# Altium PCB bbr18_ball_led_board.PcbDoc
Units mm, origin at the board's own origin, x right, y up, seen from the top; angles counter-clockwise.
Board outline 47.8 x 54.86 mm, 2 copper layers (Top Layer, Bottom Layer), stack 1.571 mm thick; 8 components, 5 nets, 21 pads, 0 vias.
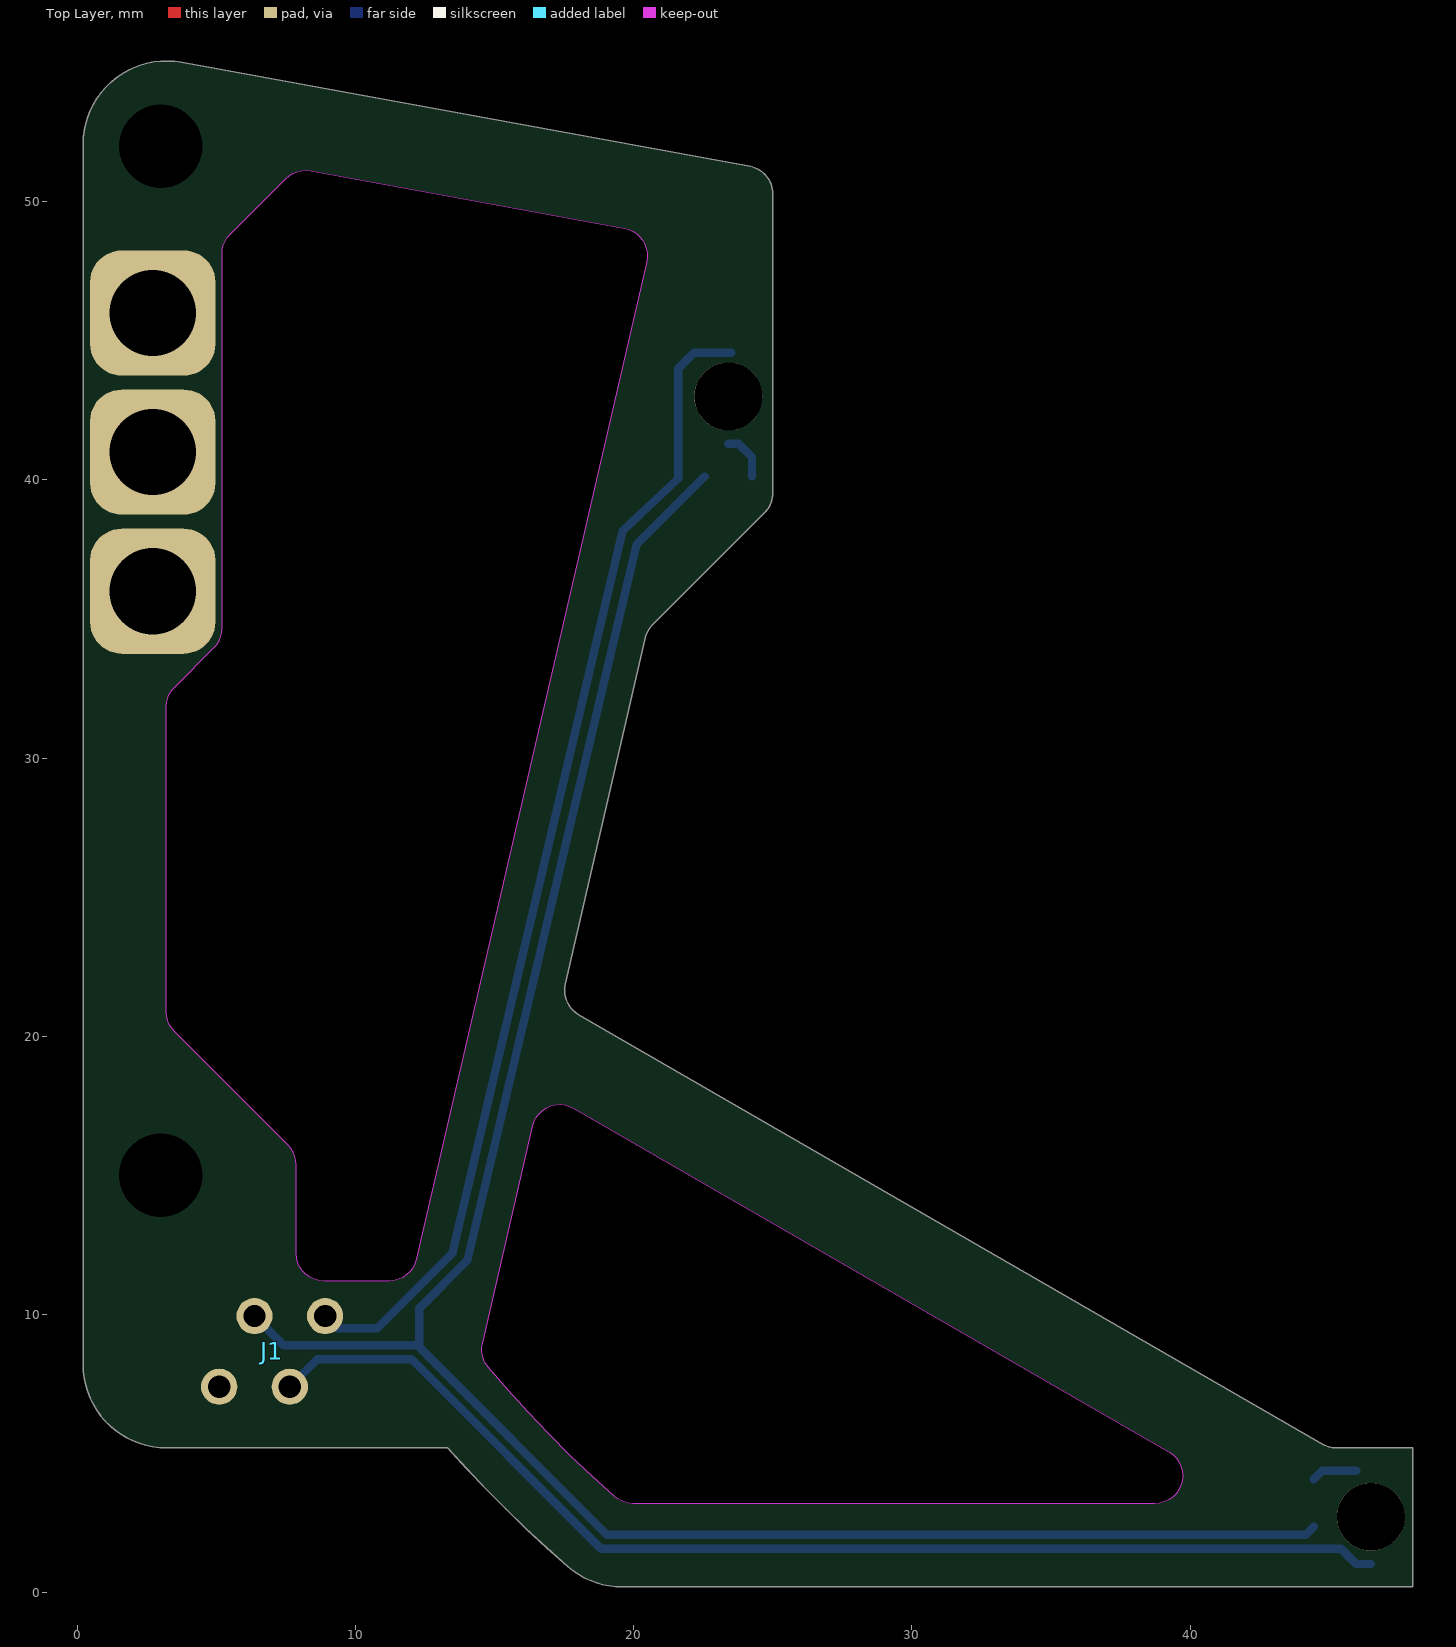
[diagram p0: Top Layer view]
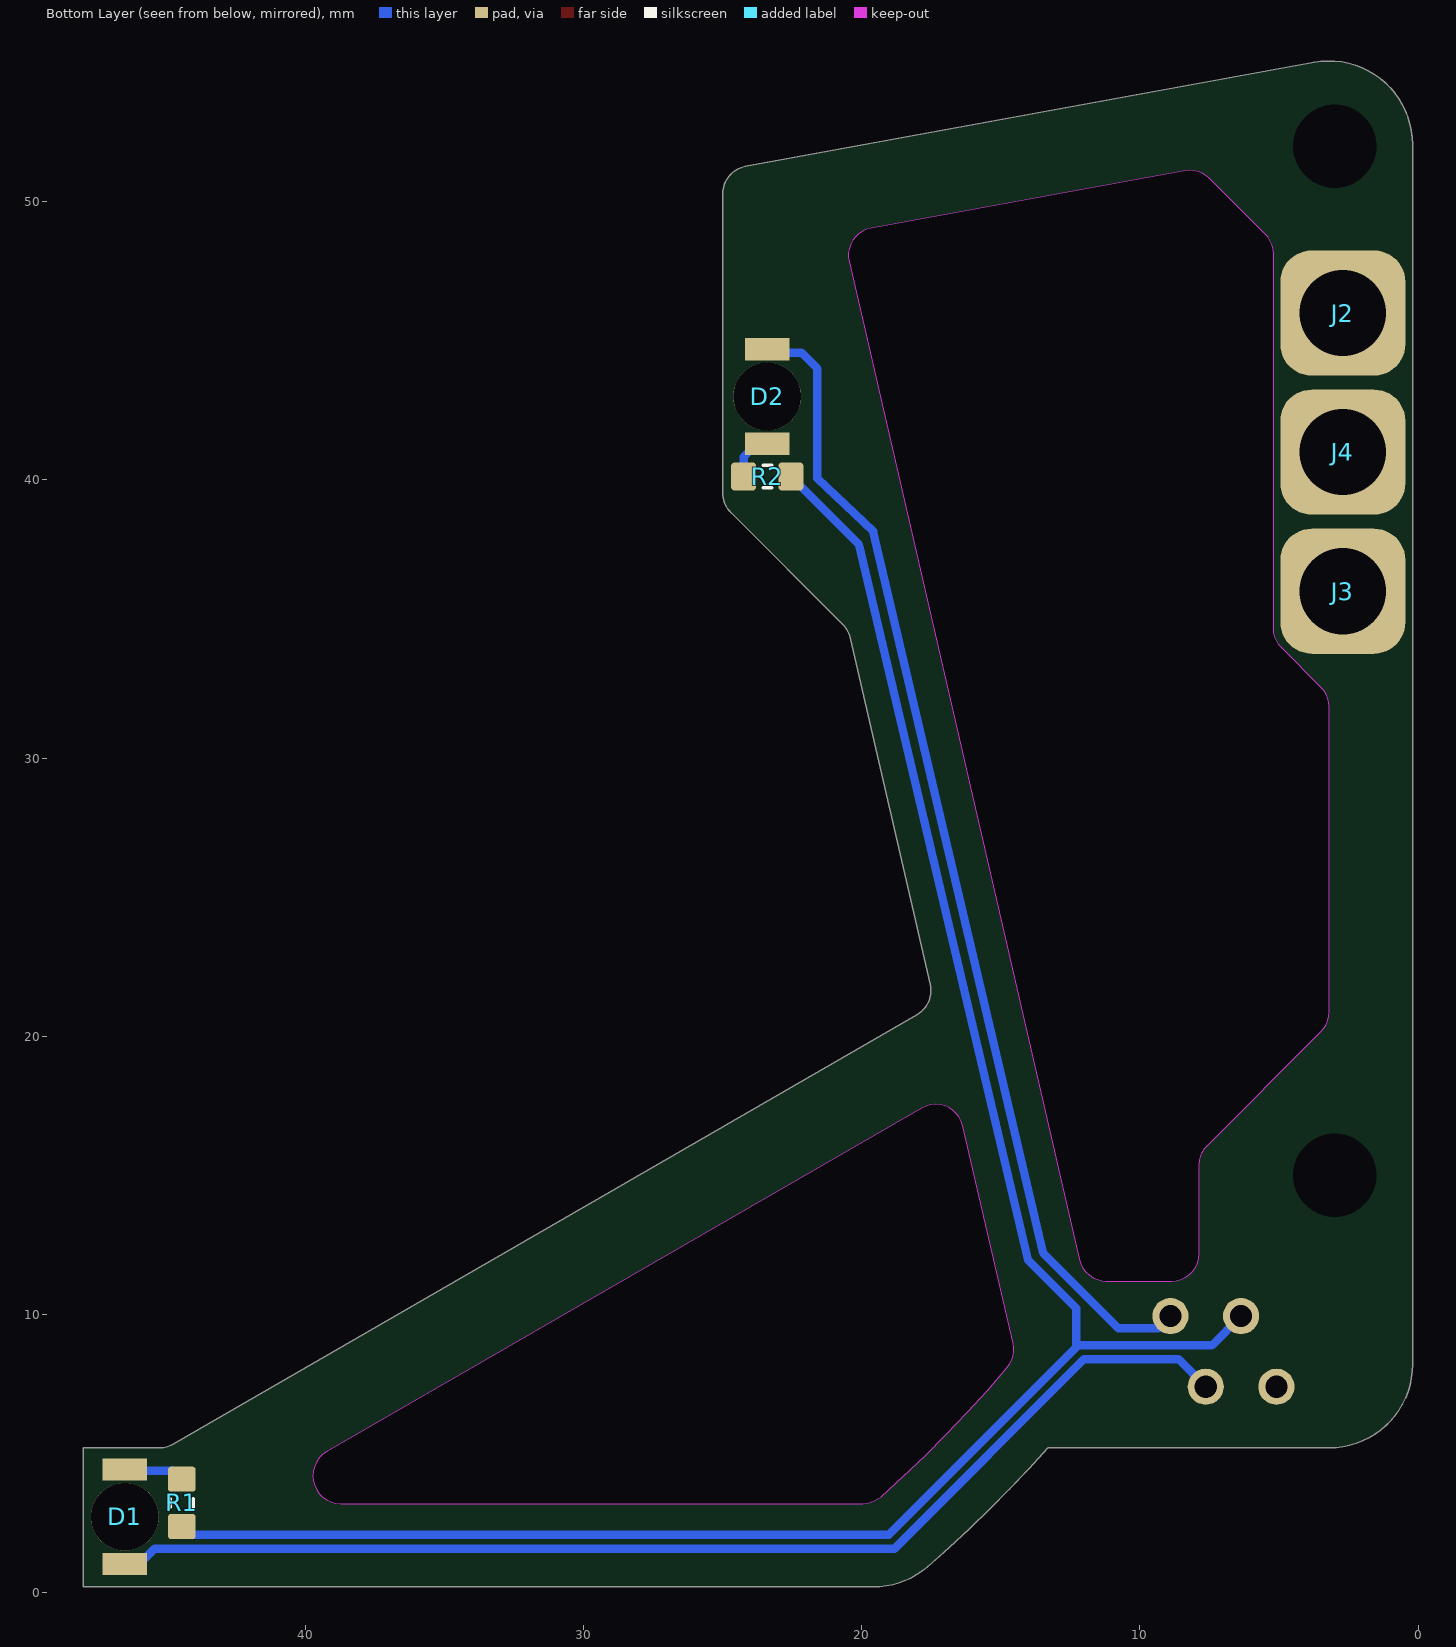
[diagram p1: Bottom Layer view, seen from below]
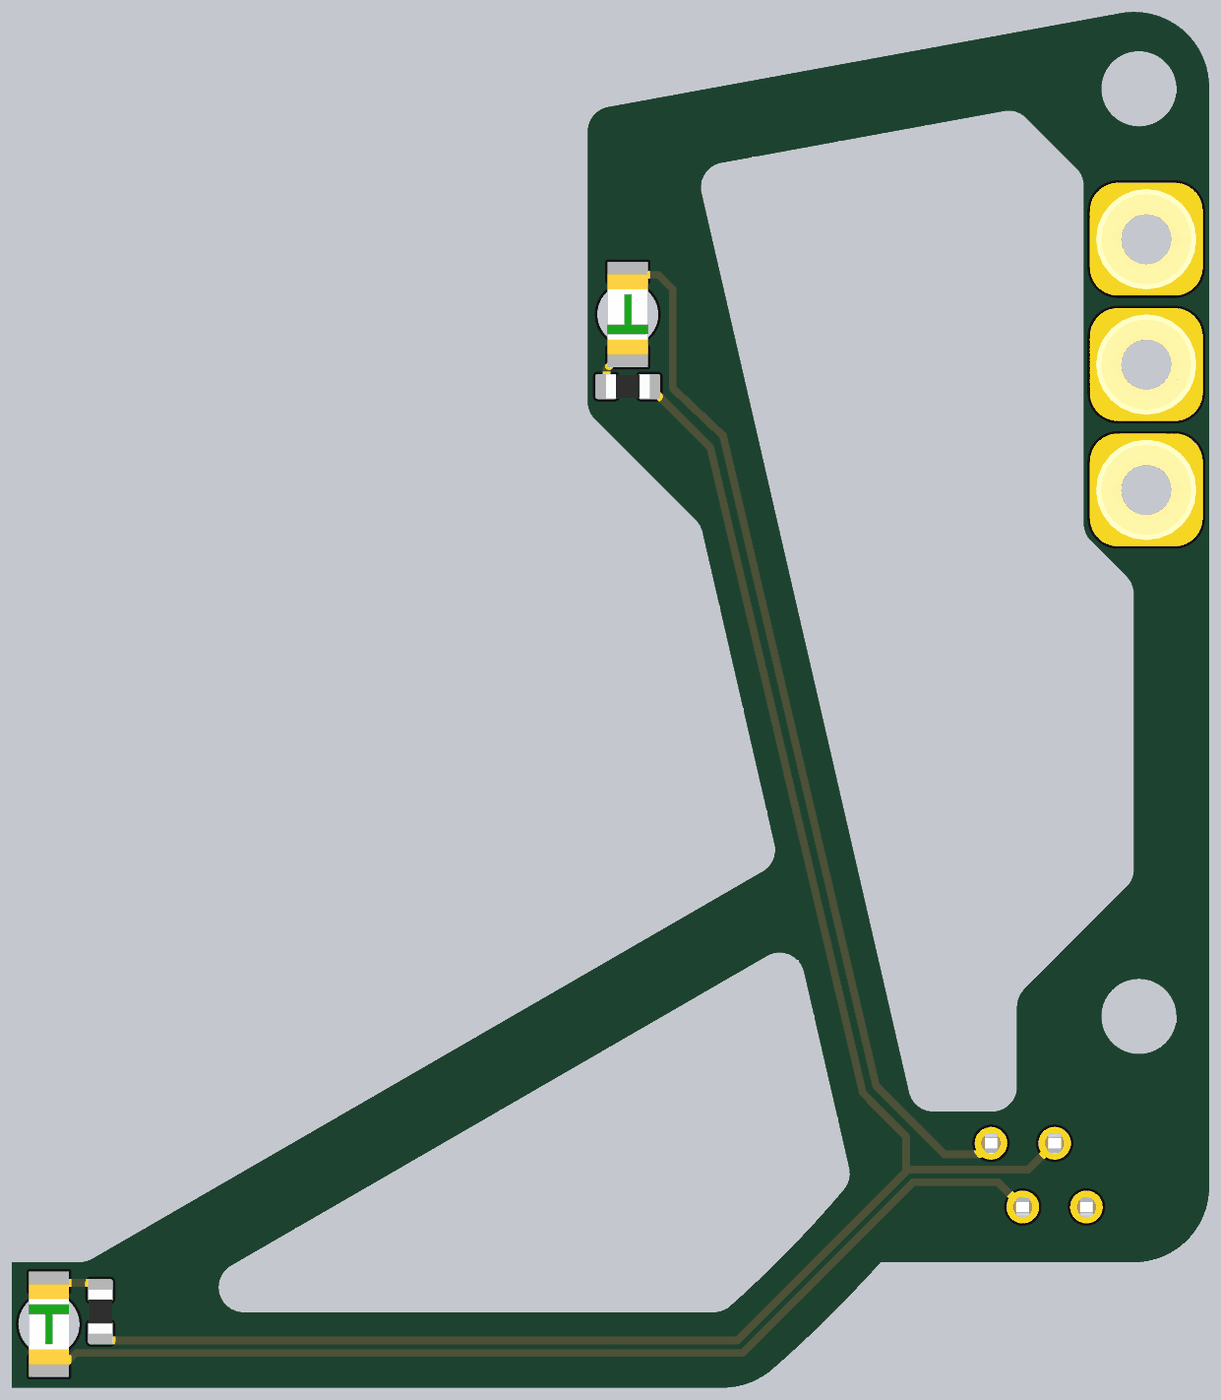
[diagram p2: 3D render of the assembled board from below, using the file's embedded part models]

## Layer stack, top to bottom
Top Solder: solder mask 0.0102, Solder Resist, Dk 3.5
Top Layer: signal copper 0.0356
Dielectric 1: dielectric 1.5, FR-4, Dk 4.8
Bottom Layer: signal copper 0.0356
Bottom Solder: solder mask 0.0102, Solder Resist, Dk 3.5

## Board outline
3.2,5.2 cw(c3.2,8.2) 0.2,8.2 0.2,52.061 cw(c3.2,52.061) 3.74,55.012 24.18,51.271 cw(c24,50.287) 25,50.287 25,39.535 cw(c24,39.535) 24.707,38.828 20.685,34.805 ccw(c21.392,34.098) 20.417,34.323 17.542,21.87 ccw(c18.517,21.645) 18.017,20.779 44.768,5.334 ccw(c45.268,6.2) 45.268,5.2 48,5.2 48,0.2 19.596,0.2 cw(c19.596,3.2) 17.627,0.937 cw(c49,37) 13.312,5.2
cut-out: 14.773,8.094 cw(c15.537,8.739) 14.563,8.964 16.366,16.775 cw(c17.34,16.55) 17.84,17.416 39.232,5.066 cw(c38.732,4.2) 38.732,3.2 19.972,3.2 cw(c19.972,4.2) 19.31,3.451 cw(c49,37)
cut-out: 3.493,20.164 cw(c4.2,20.871) 3.2,20.871 3.2,31.843 cw(c4.2,31.843) 3.493,32.55 4.907,33.964 ccw(c4.2,34.672) 5.2,34.672 5.2,48.129 cw(c6.2,48.129) 5.493,48.836 7.493,50.836 cw(c8.2,50.129) 8.38,51.113 19.664,49.047 cw(c19.484,48.064) 20.459,47.839 12.179,11.975 cw(c11.205,12.2) 11.205,11.2 8.864,11.2 cw(c8.864,12.2) 7.864,12.2 7.864,15.378 ccw(c6.864,15.378) 7.571,16.085
cut-out: 4.5,33.557

## Design rules (kind name [scope] priority, off if disabled: settings)
BoardOutlineClearance [All] p1: gap=0.2 ignorepadtopadclearanceinfootprint=FALSE except(0: Arc-SplitContinuation Track-SplitContinuation SMDPad-SplitContinuation THPad-SplitContinuation Via-SplitContinuation Fill-SplitContinuation Poly-SplitContinuation Region-SplitContinuation Text-SplitContinuation)
Clearance ClearanceKeepOut [All vs OnLayer('Keep-Out Layer')] p1: gap=0.1 ignorepadtopadclearanceinfootprint=FALSE
Clearance [All] p2: gap=0.2 ignorepadtopadclearanceinfootprint=TRUE
ComponentClearance NetTieClearance [HasFootprint('NET-TIE-0602')] p1: gap=0 collisioncheckmode=3 verticalgap=0 showdistances=FALSE
ComponentClearance [All] p2: gap=0.2 collisioncheckmode=3 verticalgap=0.2 showdistances=FALSE
DiffPairsRouting [All] p1: maxlimit=0.3 minlimit=0.2 mostfreqgap=0.2 toplayer_minwidth=0.2 toplayer_maxwidth=1 toplayer_prefwidth=0.3 bottomlayer_minwidth=0.2 bottomlayer_maxwidth=1 bottomlayer_prefwidth=0.3 maxuncoupledlength=12.7
HoleSize [All] p1: absolutevalues=TRUE maxlimit=5 minlimit=0.3 maxpercent=80.000 minpercent=20.000
HoleToHoleClearance [All] p1: gap=0.2 allowstackedmicrovias=TRUE
MinimumSolderMaskSliver [All] p1: minsoldermaskwidth=0.2
PolygonConnect DirectConnectPolygons [All vs IsNamedPolygon('Power 16V') or IsNamedPolygon('Power GND') or IsNamedPolygon('Driver 16V') or InNet('SL_A') or InNet('SL_B') or InNet('SL_C') or InNet('MOT_A') or InNet('MOT_B') or InNet('MOT_C') or InNet('BAT_GND') or InNet('16V') or InNet('SLA_SHUNT') or InNet('SLB_SHUNT') or InNet('SLC_SHUNT')] p1: connectstyle=Direct reliefconductorwidth=0.254 reliefentries=4 polygonreliefangle="90 Angle" airgapwidth=0.254
PolygonConnect [All] p2: connectstyle=Relief reliefconductorwidth=0.254 reliefentries=4 polygonreliefangle="90 Angle" airgapwidth=0.254
RoomDefinition bbr18_ball_led_board [InComponentClass('bbr18_ball_led_board')] p1: confinementstyle=ConfineIn formatcopy=TRUE lockcomponents=FALSE outline -25.4,-25.4 75.9,-25.4 75.9,71.5 -25.4,71.5
RoutingVias [All] p1: holewidth=0.3 width=0.6 viastyle="Through Hole" minholewidth=0.3 minwidth=0.6 maxholewidth=2 maxwidth=3
SolderMaskExpansion SolderMaskExpansionVia [IsVia And (Not IsTestpoint)] p1: expansion=-5
SolderMaskExpansion [All] p2: expansion=0.1
Width [All] p1: maxlimit=5 minlimit=0.2 preferedwidth=0.3
25 further rules are at their usual default settings.

## Components (designator, comment, footprint, x,y, rotation, side; value= is the part's Value field where it differs from the comment)
D1 "5 mW/sr, 1.2 V, 30°" "WL-SIRW_1206_15412094A3060_reverse use" 46.5,2.725 r270 bottom
D2 "5 mW/sr, 1.2 V, 30°" "WL-SIRW_1206_15412094A3060_reverse use" 23.4,43 r90 bottom
J1 "HEADER-4" MICRO-MATCH-MOB-04 5.095,7.4 r0 top
J2 "HEADER-1" 2MM-BANANA-VIA 2.707,46 r180 bottom
J3 "HEADER-1" 2MM-BANANA-VIA 2.707,36 r180 bottom
J4 "HEADER-1" 2MM-BANANA-VIA 2.707,41 r180 bottom
R1 "1k" RESC1608X55N 44.45,3.225 r90 bottom value=1K
R2 "1k" RESC1608X55N 23.4,40.125 r0 bottom value=1K

## Footprints (in the part's own frame and the unit in brackets; to place one, negate y for a bottom-side part, rotate by r counter-clockwise, add the part's x,y. Pads: shape width x height; smd on the part's side, far side on the other; paste and mask are expansions set on the pad)
2MM-BANANA-VIA [mm]
  rrect50% 4.5x4.5 hole 3.1: 1(0,0)
  body extent -2,-2 2,2, height 1.51
MICRO-MATCH-MOB-04 [mm]
  round 1.3 hole 0.8: 1(0,0) 2(1.27,2.54) 3(2.54,0) 4(3.81,2.54)
  body extent -2.22,-1.23 6.04,3.77, height 6.9
RESC1608X55N [mm] "Chip Resistor, Body 1.6x0.8mm, EIA 0603, IPC Medium Density"
  round 0.254 on Mech15: 0(0,0)
  rrect25% 0.9x1 smd: 1(-0.85,0) 2(0.85,0)
  Top Layer pour cut-out: -0.6,0.5 -0.4,0.7 0.4,0.7 0.6,0.5 0.6,-0.5 0.4,-0.7 -0.4,-0.7 -0.6,-0.5
  silkscreen extent -0.15,-0.41 0.15,0.41, body extent -0.87,-0.47 0.88,0.48, height 0.54
"WL-SIRW_1206_15412094A3060_reverse use" [mm] "SMD Infrared Reverse mount Waterclear Dome, body 3.2x1.6mm"
  rect 0.8x1.6 smd: 1(-1.7,0) 2(1.7,0)
  round 2.44 hole 2.44 unplated: ""(0,0)
  body extent -1.6,-0.8 1.6,0.8, height 0.28

## Part data
D1 D2: library part 15412094A3060, "WL-SIRW SMD Infrared Reverse mount Waterclear Dome, size 1206, 5 mW/sr, 1.2 V, 30°", Emitting Color=Infrared, Forward Voltage="1.2 V", Operating Temperature="-40 to 85 degC", Centroid Wavelength="940 nm", ComponentLink1Description=Manufacturer, ComponentLink1URL=http://www.we-online.de, ComponentLink2Description=Datasheet, ComponentLink2URL=http://katalog.we-online.de/led/datasheet/15412094A3060.pdf, Mounting Technology=SMT, Part Number=15412094A3060, Peak Wavelength="940 nm", Published Date="May 2018", Publisher="Wurth Elektronik", Radiant Intensity="5 mW/sr", Size=1206, Viewing Angle=30°
R1 R2: library part RES_1K_0603_5%, "Resistor SMD chip 1k Ohm 0.1W 5% 0603", Manufacturer 1=Yageo, Manufacturer 2="Vishay Dale", Manufacturer Part Number 1=RC0603JR-071KL, Manufacturer Part Number 2=CRCW06031K00JNEA, Package / Case="0603 (1608 metric)", Ratings="1/10 W", Supplier Part Number 1=311-1.0KGRCT-ND, Tolerance=±5%, ComponentLink1Description=http://www.yageo.com/documents/recent/PYu-RC0603_51_RoHS_L_4.pdf, ComponentLink1URL=http://www.yageo.com/documents/recent/PYu-RC0603_51_RoHS_L_4.pdf, ComponentLink2Description=http://www.vishay.com/doc?20008, ComponentLink2URL=http://www.vishay.com/doc?20008, Material="Thick Film", SCDType=spec, Supplier 1=Digi-Key, Supplier 2=Digi-Key, Supplier Part Number 2=541-1.0KGCT-ND

## Free pads (board coordinates)
  round 0 hole 3 unplated: 12(3,15) 13(3,52)

## Nets (pads, with @x,y where several pads share a name; then routed paths per layer and width w, separated by ;. In a path a pad name is that pad's centre, name@x,y a point inside that pad or via, vN(x,y) a via of type N, cw(c..) or ccw(c..) an arc to the next point about the centre after c; other vN are vias at no path point)
5V: J1.2 R1.1 R2.1 | length 75.2
  Bottom Layer w0.3: J1.2 7.416,8.889 12.225,8.889 12.288,8.825 ; R2.1 20.1,37.675 14.02,11.953 12.288,10.213 12.288,8.825 ; R1.1 44.15,2.075 19.038,2.075 12.288,8.825
LED1: D1.2 J1.3 | length 42.3
  Bottom Layer w0.3: J1.3 8.624,8.389 12.011,8.389 18.825,1.575 45.425,1.575 45.975,1.025 D1.2
LED2: D2.2 J1.4 | length 41.4
  Bottom Layer w0.3: J1.4 9.345,9.5 10.775,9.5 13.487,12.212 19.594,38.16 21.6,40.05 21.6,44 22.175,44.575 D2.2@23.5,44.575
NetD1_1: D1.1 R1.2 | length 1.6
  Bottom Layer w0.3: R1.2 44.75,4.375 D1.1@45.975,4.375
NetD2_1: D2.1 R2.2 | length 1.7
  Bottom Layer w0.3: D2.1 23.775,41.3 24.25,40.825 R2.2
pads on no net: D1. D2. J1.1 J2.1 J3.1 J4.1 R1.0 R2.0

## Silkscreen, mask and mechanical layers (free items; w line width, h text height)
Mechanical 1:
  lines w0.1: 0.2,8.2 ccw(c3.2,8.2) 3.2,5.2 13.312,5.2 ccw(c49,37) 17.627,0.937 ccw(c19.596,3.2) 19.596,0.2 48,0.2 48,5.2 45.268,5.2 cw(c45.268,6.2) 44.768,5.334 18.017,20.779 cw(c18.517,21.645) 17.542,21.87 20.417,34.323 cw(c21.392,34.098) 20.685,34.805 24.707,38.828 ccw(c24,39.535) 25,39.535 25,50.287 ccw(c24,50.287) 24.18,51.271 3.74,55.012 ccw(c3.2,52.061) 0.2,52.061 0.2,8.2 ; 3.2,20.871 ccw(c4.2,20.871) 3.493,20.164 7.571,16.085 cw(c6.864,15.378) 7.864,15.378 7.864,12.2 ccw(c8.864,12.2) 8.864,11.2 11.205,11.2 ccw(c11.205,12.2) 12.179,11.975 20.459,47.839 ccw(c19.484,48.064) 19.664,49.047 8.38,51.113 ccw(c8.2,50.129) 7.493,50.836 5.493,48.836 ccw(c6.2,48.129) 5.2,48.129 5.2,34.672 cw(c4.2,34.672) 4.907,33.964 3.493,32.55 ccw(c4.2,31.843) 3.2,31.843 3.2,20.871 ; 14.563,8.964 ccw(c15.537,8.739) 14.773,8.094 ccw(c49,37) 19.31,3.451 ccw(c19.972,4.2) 19.972,3.2 38.732,3.2 ccw(c38.732,4.2) 39.232,5.066 17.84,17.416 ccw(c17.34,16.55) 16.366,16.775 14.563,8.964